# Altium PCB PCB2.PcbDoc
Units mm, origin at the board's own origin, x right, y up, seen from the top; angles counter-clockwise.
Board outline 150 x 120 mm, 4 copper layers (Top Layer, GND, VCC, Bottom Layer), stack 0.778 mm thick; 112 components, 75 nets, 379 pads, 111 vias.
Unrouted connection lines stored in the file: 76.
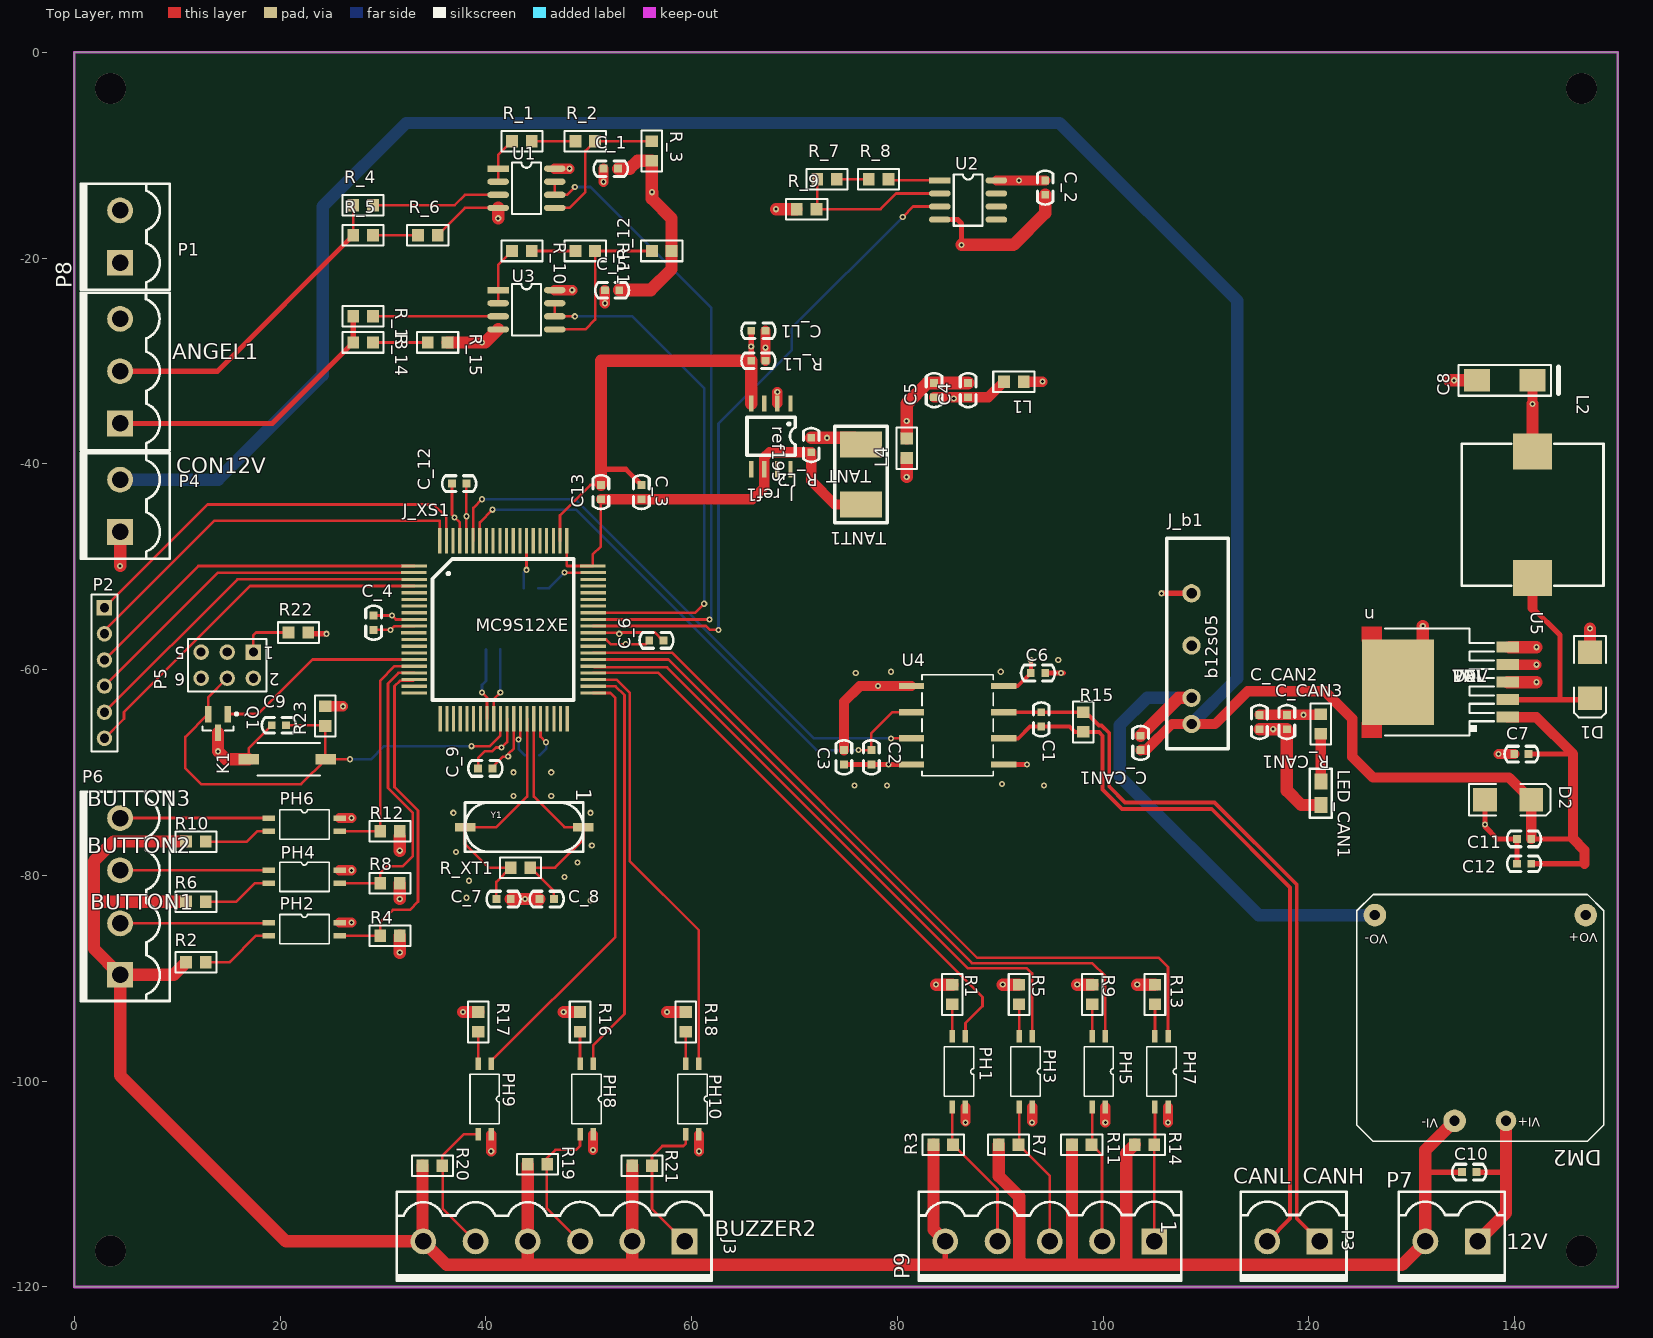
[diagram p0: Top Layer view]
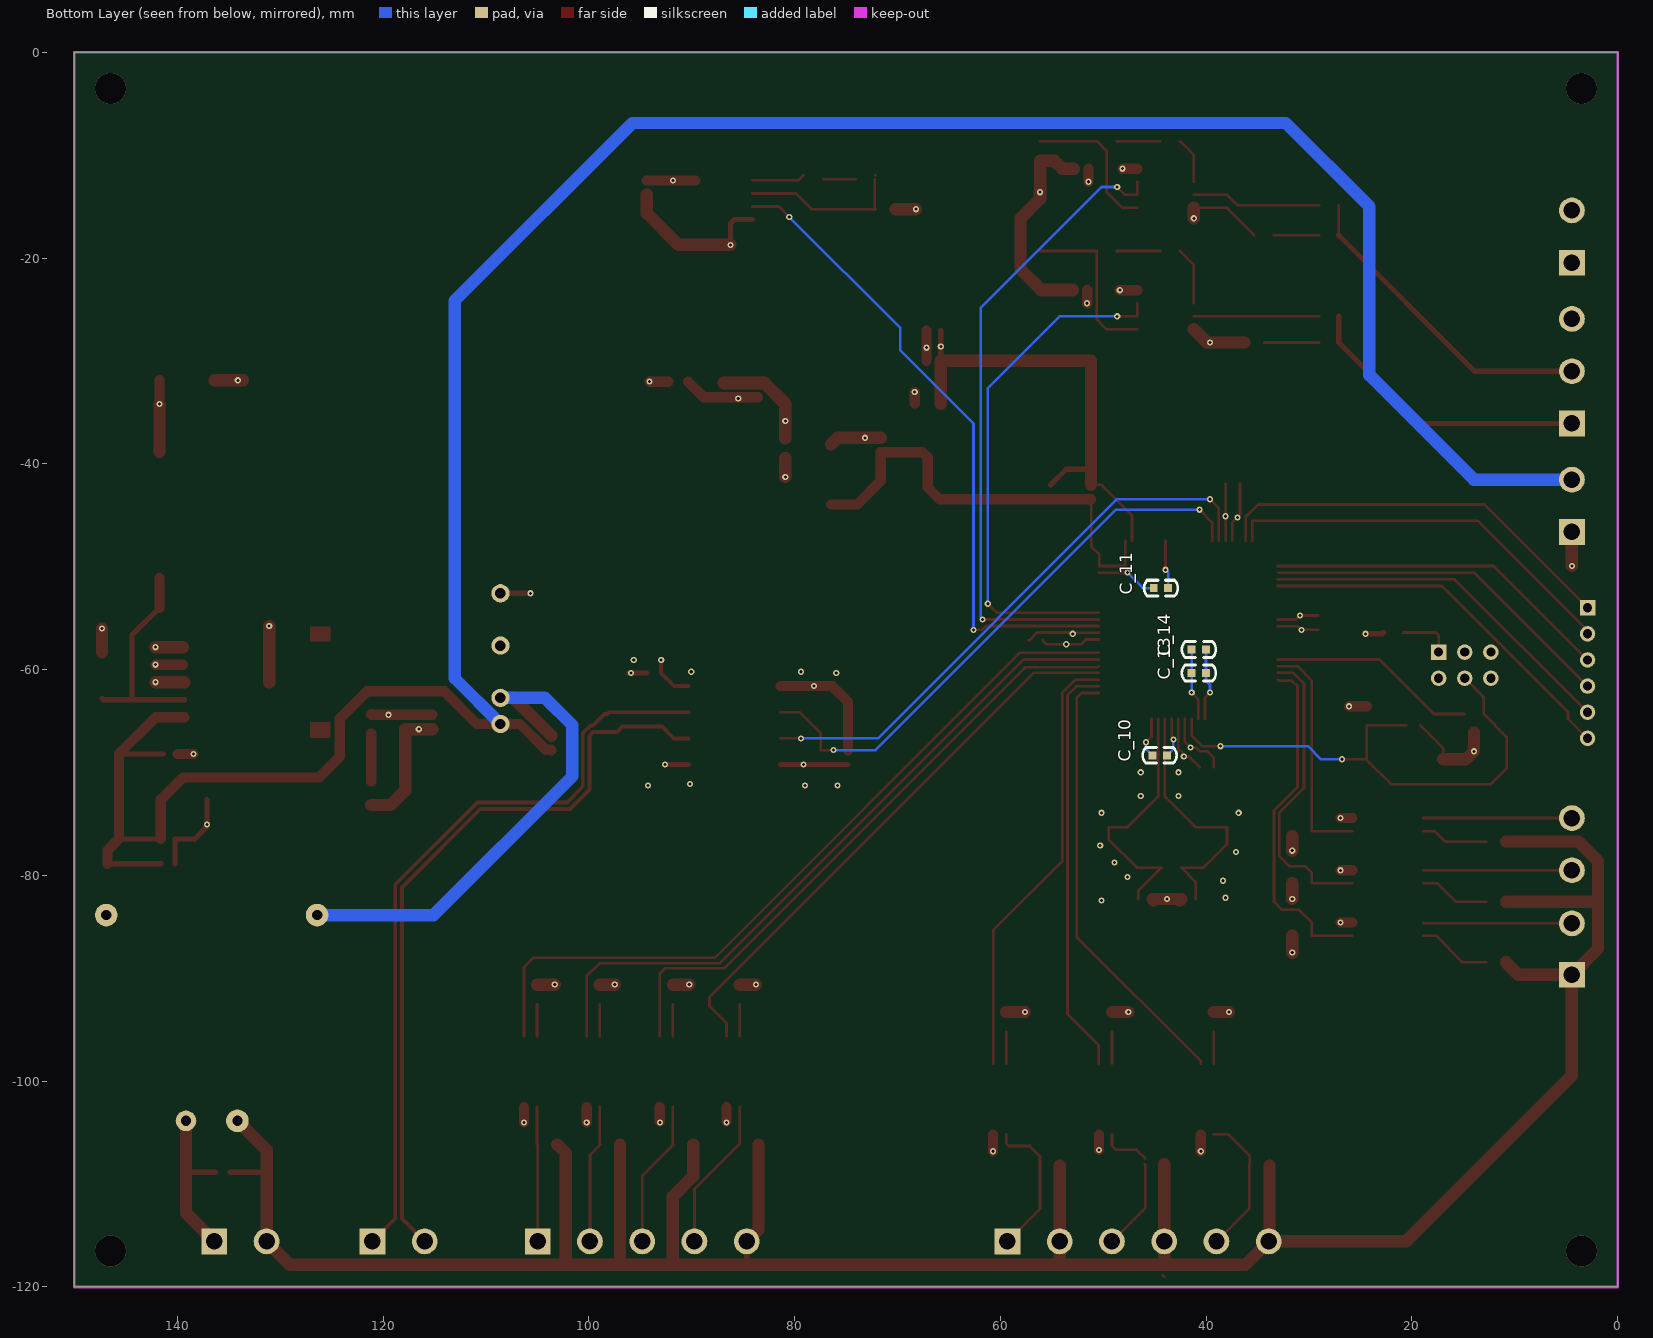
[diagram p1: Bottom Layer view, seen from below]
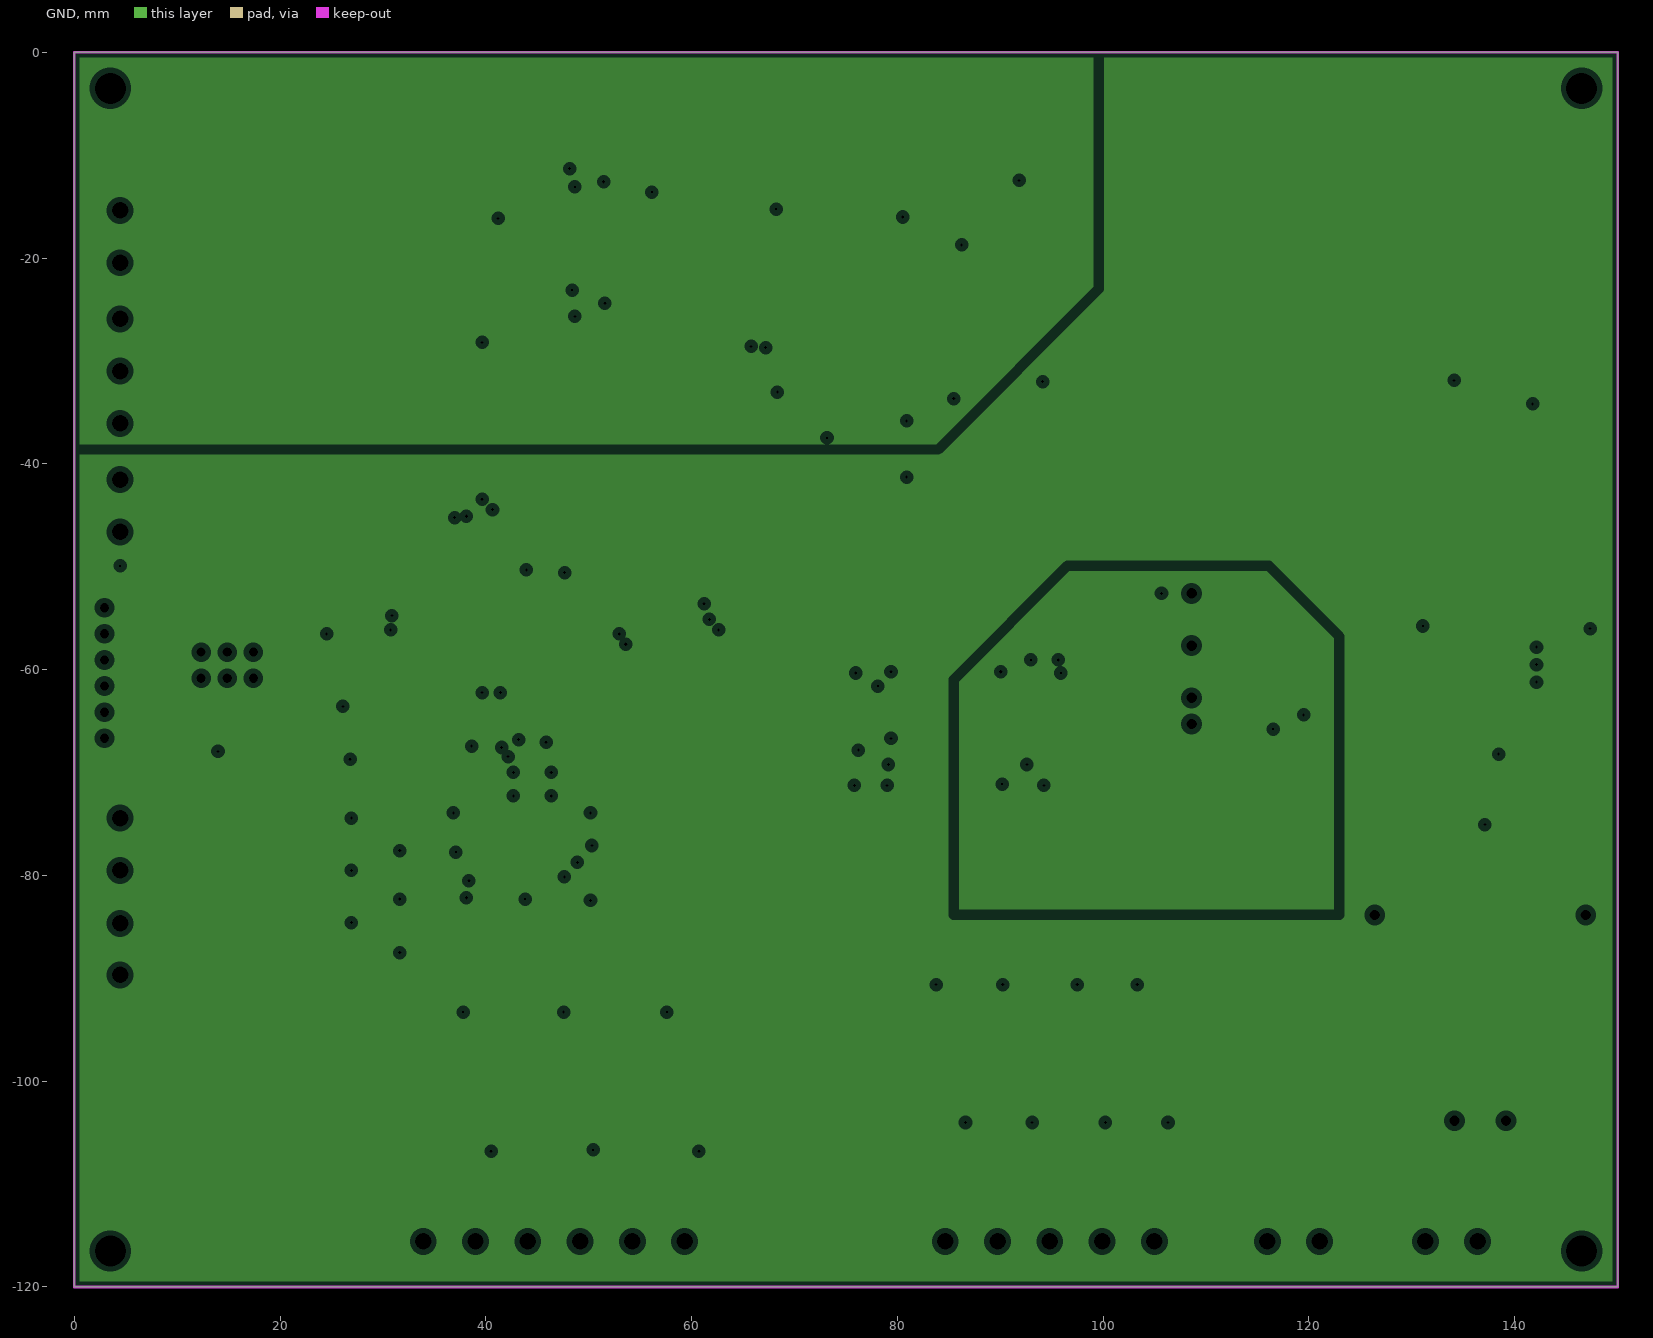
[diagram p2: GND, clearances drawn from the general rule]
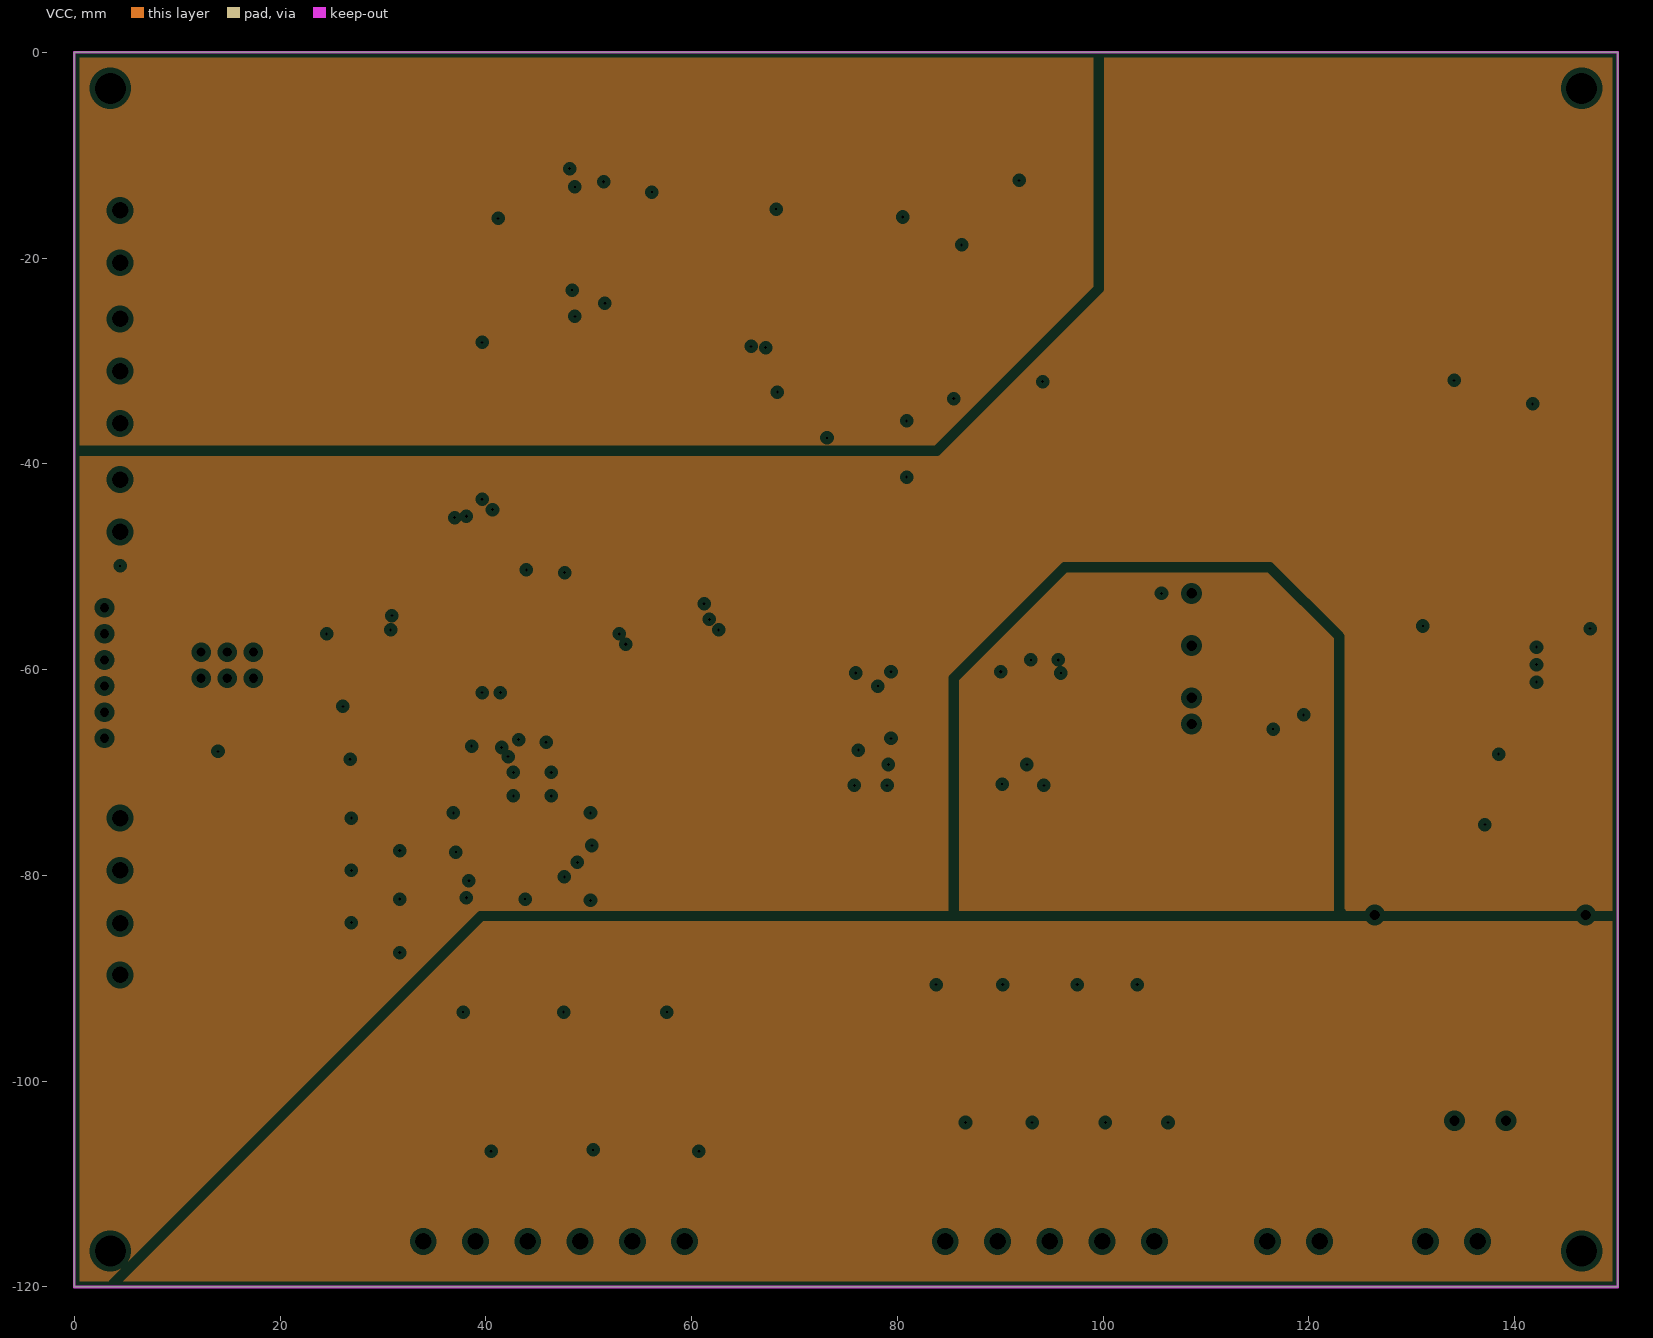
[diagram p3: VCC, clearances drawn from the general rule]

## Layer stack, top to bottom
Top Solder: solder mask 0.0102, Solder Resist, Dk 3.5
Top Layer: signal copper 0.0356
Dielectric 1: core 0.254, FR-4, Dk 4.2
GND: plane copper 0.036
Dielectric 3: prepreg 0.127, Dk 4.2
VCC: plane copper 0.036
Dielectric 2: core 0.254, Dk 4.2
Bottom Layer: signal copper 0.0356
Bottom Solder: solder mask 0.0102, Solder Resist, Dk 3.5

## Board outline
0,-120 150,-120 150,0 0,0

## Design rules (kind name [scope] priority, off if disabled: settings)
Clearance [All] p1: gap=0.254
DiffPairsRouting DiffPair_DiffPairsRouting [InDifferentialPair ('CAN')] p1: maxlimit=0.254 minlimit=0.254 mostfreqgap=0.254 toplayer_minwidth=0.381 toplayer_maxwidth=0.381 toplayer_prefwidth=0.381 bottomlayer_minwidth=0.381 bottomlayer_maxwidth=0.381 bottomlayer_prefwidth=0.381 maxuncoupledlength=12.7
DiffPairsRouting CAN_DiffPairsRouting [InDifferentialPair ('CAN')] p2: maxlimit=0.254 minlimit=0.254 mostfreqgap=0.254 toplayer_minwidth=0.381 toplayer_maxwidth=0.381 toplayer_prefwidth=0.381 bottomlayer_minwidth=0.381 bottomlayer_maxwidth=0.381 bottomlayer_prefwidth=0.381 maxuncoupledlength=12.7
DiffPairsRouting DiffPair_DiffPairsRouting [All] p3: maxlimit=0.254 minlimit=0.254 mostfreqgap=0.254 toplayer_minwidth=0.381 toplayer_maxwidth=0.381 toplayer_prefwidth=0.381 bottomlayer_minwidth=0.381 bottomlayer_maxwidth=0.381 bottomlayer_prefwidth=0.381 maxuncoupledlength=12.7
DiffPairsRouting [All] p4: maxlimit=0.254 minlimit=0.254 mostfreqgap=0.254 toplayer_minwidth=0.381 toplayer_maxwidth=0.381 toplayer_prefwidth=0.381 bottomlayer_minwidth=0.381 bottomlayer_maxwidth=0.381 bottomlayer_prefwidth=0.381 maxuncoupledlength=12.7
HoleSize [All] p1: absolutevalues=TRUE maxlimit=3 minlimit=0.025 maxpercent=80.000 minpercent=20.000
MatchedLengths DiffPair_MatchedLengths [InDifferentialPair ('CAN')] p1: tolerance=25.4 checknetsindiffpair=FALSE checkdiffpairvsdiffpair=TRUE checkxsignals=TRUE checkothers=TRUE
MatchedLengths CAN_MatchedLengths [InDifferentialPair ('CAN')] p2: tolerance=25.4 checknetsindiffpair=FALSE checkdiffpairvsdiffpair=TRUE checkxsignals=TRUE checkothers=TRUE
MatchedLengths DiffPair_MatchedLengths [All] p3: tolerance=25.4 checknetsindiffpair=FALSE checkdiffpairvsdiffpair=TRUE checkxsignals=TRUE checkothers=TRUE
MinimumSolderMaskSliver [All] p1: minsoldermaskwidth=0
PlaneClearance [All] p1: clearance=0.508
PlaneConnect [All] p1: planeconnectstyle=Relief reliefexpansion=0.508 reliefentries=4 reliefconductorwidth=0.254 reliefairgap=0.254
PolygonConnect [All] p1: connectstyle=Relief reliefconductorwidth=0.254 reliefentries=4 polygonreliefangle="90 Angle" airgapwidth=0.254
RoutingVias [All] p1: holewidth=0.711 width=1.27 viastyle="Through Hole" minholewidth=0.711 minwidth=1.27 maxholewidth=0.711 maxwidth=1.27
SilkToSilkClearance [All] p1: silktosilkclearance=0
SilkToSolderMaskClearance [IsPad] p1: minsilkscreentomaskgap=0 clearancetoexposedcopper=TRUE
SolderMaskExpansion [All] p1: expansion=0.102
Width [All] p1: maxlimit=1.5 minlimit=0.254 preferedwidth=0.254 minimp=50.000000 maximp=50.000000 favimp=50.000000
23 further rules are at their usual default settings.

## Classes and differential pairs
differential pair CAN: +CAN_P -CAN_N

## Components (designator, comment, footprint, x,y, rotation, side; value= is the part's Value field where it differs from the comment)
1 "XTAL" CRYSTAL_SMD_FIRE 49.473,-72.911 r0 top
C1 "Cap Pol3" 0603C 93.98,-64.262 r270 top
C2 "Cap Pol3" 0603C 77.47,-67.945 r270 top
C3 "Cap Pol3" 0603C 74.803,-67.945 r270 top
C4 "Cap Pol3" 0603C 86.868,-33.401 r90 top
C5 "Cap Pol3" 0603C 83.566,-33.401 r90 top
C6 "Cap Pol3" 0603C 94.234,-60.325 r180 top
C7 "Cap Pol3" 0603C 141.224,-68.199 r180 top
C8 "Cap Pol3" TITANIUMCAPC6032 139.032,-31.877 r180 top
C9 "Cap" 0603C 19.304,-65.405 r0 top
C10 "Cap Pol3" 0603C 136.144,-108.839 r180 top
C11 "Cap Pol3" 0603C 141.478,-76.454 r180 top
C12 "Cap Pol3" 0603C 141.478,-78.867 r180 top
C13 "Cap Pol3" 0603C 51.181,-43.307 r90 top
C_1 "104" 0603C 51.562,-11.303 r0 top
C_2 "104" 0603C 94.361,-12.573 r270 top
C_3 "104" 0603C 55.118,-43.307 r90 top
C_4 "104" 0603C 29.083,-54.864 r270 top
C_5 "104" 0603C 51.689,-23.114 r0 top
C_6 "104" 0603C 57.15,-57.15 r180 top
C_7 "104" 0603C 42.291,-82.296 r180 top
C_8 "104" 0603C 45.339,-82.296 r0 top
C_9 "104" 0603C 40.513,-69.596 r180 top
C_10 "104" 0603C 43.942,-68.326 r0 bottom
C_11 "104" 0603C 43.815,-52.07 r0 bottom
C_12 "104" 0603C 37.973,-41.91 r180 top
C_13 "104" 0603C 40.132,-60.325 r0 bottom
C_14 "104" 0603C 40.132,-58.039 r0 bottom
C_CAN1 "104" 0603C 103.632,-66.548 r270 top
C_CAN2 "104" 0603C 115.189,-65.659 r90 top
C_CAN3 "Cap Pol1" 0603C 117.856,-64.516 r270 top
C_L1 "Cap Pol1" 0603C 67.056,-27.051 r180 top
D1 "1N5824" SMB 147.32,-60.543 r270 top
D2 "SMBJ7.0A" SMB 139.355,-72.644 r0 top
DM2 "U?" dcdc 136.652,-93.853 r180 top
J3 "Light&Buzzer" KF2EDGK5.08-6P 59.309,-115.57 r180 top
J_b1 "b12s05" PCBComponent_1_8 108.077,-70.866 r90 top
J_ref1 "ref195" PCBComponent_1_13 69.571,-32.309 r270 top
J_XS1 "mc9s12" PCBComponent_1_15 32.791,-49.641 r0 top
K1 "SW-PB" KEY 20.701,-68.707 r180 top
L1 "Inductor" 0805 91.313,-32.004 r180 top
L2 "Inductor" L1260 141.732,-44.958 r90 top
L4 "Inductor" 0805 80.899,-38.481 r90 top
LED_CAN1 "LED2" PCBComponent_1_3 119.126,-70.231 r0 top
P1 "Header 3" KF2EDGK5.08-3P 4.445,-36.068 r90 top
P2 "Header 6" HDR1X6 2.921,-53.975 r270 top
P3 "Header 2" KF2EDGK5.08-2P 121.031,-115.57 r180 top
P4 "Header 2" KF2EDGK5.08-2P 4.445,-46.609 r90 top
P5 "Header 3X2" HDR2X3 17.399,-58.293 r180 top
P6 "Header 4" KF2EDGK5.08-4P 4.445,-89.662 r90 top
P7 "Header 2" KF2EDGK5.08-2P 136.398,-115.57 r180 top
P8 "Header 2" KF2EDGK5.08-2P 4.445,-20.447 r90 top
P9 "Header 5" KF2EDGK5.08-5P 104.968,-115.57 r180 top
PH1 "TLP291" SO4 85.979,-99.06 r270 top
PH2 "TLP291" SO4 22.352,-85.217 r0 top
PH3 "TLP291" SO4 92.456,-99.06 r270 top
PH4 "TLP291" SO4 22.352,-80.137 r0 top
PH5 "TLP291" SO4 99.568,-99.06 r270 top
PH6 "TLP291" SO4 22.352,-75.057 r0 top
PH7 "TLP291" SO4 105.664,-99.06 r270 top
PH8 "TLP291" SO4 49.784,-101.727 r270 top
PH9 "TLP291" SO4 39.878,-101.727 r270 top
PH10 "TLP291" SO4 60.071,-101.727 r270 top
Q1 "6A8" transistors 13.959,-65.212 r270 top
R1 "330" 0805 85.344,-91.567 r90 top
R2 "330" 0805 11.811,-88.453 r180 top
R3 "10k" 0805 84.455,-106.172 r0 top
R4 "1.9k" 0805 30.673,-85.852 r180 top
R5 "330" 0805 91.821,-91.567 r90 top
R6 "330" 0805 11.811,-82.55 r180 top
R7 "10k" 0805 90.805,-106.172 r0 top
R8 "1.9k" 0805 30.673,-80.772 r180 top
R9 "330" 0805 98.933,-91.567 r90 top
R10 "330" 0805 11.811,-76.708 r180 top
R11 "10k" 0805 97.917,-106.172 r0 top
R12 "1.9k" 0805 30.673,-75.692 r180 top
R13 "330" 0805 105.029,-91.567 r90 top
R14 "10k" 0805 104.013,-106.172 r0 top
R15 "Res3" 0805 98.044,-65.09 r90 top
R16 "Res2" 0805 49.149,-94.234 r270 top
R17 "Res2" 0805 39.243,-94.234 r270 top
R18 "Res2" 0805 59.436,-94.234 r270 top
R19 "Res2" 0805 45.019,-108.077 r0 top
R20 "Res2" 0805 34.798,-108.204 r0 top
R21 "Res2" 0805 55.184,-108.204 r0 top
R22 "Res3" 0805 21.778,-56.388 r180 top
R23 "Res3" 0805 24.384,-64.516 r90 top
R_1 "16k" 0805 43.495,-8.636 r0 top
R_2 "1k" 0805 49.657,-8.636 r0 top
R_3 "33k" 0805 56.134,-9.591 r90 top
R_4 "0" 0805 28.067,-14.859 r0 top
R_5 "120" 0805 28.067,-17.78 r0 top
R_6 "130" 0805 34.351,-17.78 r0 top
R_7 "16k" 0805 73.152,-12.319 r0 top
R_8 "1k" 0805 78.166,-12.319 r0 top
R_9 "33k" 0805 71.181,-15.24 r0 top
R_10 "16k" 0805 43.495,-19.304 r0 top
R_11 "1k" 0805 49.657,-19.304 r0 top
R_12 "33k" 0805 57.089,-19.304 r180 top
R_13 "0" 0805 28.067,-25.654 r0 top
R_14 "120" 0805 28.067,-28.194 r0 top
R_15 "130" 0805 35.311,-28.194 r0 top
R_CAN1 "Res3" 0805 121.158,-65.278 r270 top
R_L1 "104" 0603C 65.913,-29.972 r0 top
R_L2 "104" 0603C 71.628,-37.592 r270 top
R_XT1 "Res3" 0805 43.368,-79.248 r0 top
TANT1 "Cap Pol1" PCBComponent_1_19 84.836,-42.672 r180 top
U1 "OP279" SOP8_M 43.942,-13.208 r0 top
U2 "OP279" SOP8_M 86.868,-14.351 r0 top
U3 "OP279" SOP8_M 43.942,-25.019 r0 top
U4 "Part Number: ISO1050DUBR" DUB8 85.852,-65.405 r0 top
U5 "LM2596_TO263" LM2596_TO263 133.985,-61.214 r0 top

## Footprints (in the part's own frame and the unit in brackets; to place one, negate y for a bottom-side part, rotate by r counter-clockwise, add the part's x,y. Pads: shape width x height; smd on the part's side, far side on the other; paste and mask are expansions set on the pad)
0603C [mil]
  rect 30x30 smd: 1(-5,0) 2(50,0)
  silkscreen extent -42,-30 87,30
0805 [mm]
  rect 1.14x1.2 smd: 1(-0.955,0) 2(0.955,0)
  silkscreen extent -2,-1 2,1, body extent -1.15,-0.67 1.15,0.68, height 0.76
CRYSTAL_SMD_FIRE [mm]
  rect 2x0.85 smd: 1(-11.5,-2.4) 2(0,-2.4)
  silkscreen extent -11.5,-4.8 0,0
dcdc [mm]
  round 2 hole 1 unplated: 1(-2.5,10)
  round 2.2 hole 1 unplated: 2(2.5,9.996) 3(10.25,-10) 4(-10.25,-10)
  Top Layer lines w0.4: -9.594,-10.4 -10,-9.993
  Bottom Layer lines w0.4: -10,-9.993 -10,-9.993
  silkscreen extent -12,-12 12,12
DUB8 [mil]
  rect 96.5x24 smd paste+0 mask+0: 1(-176.25,150) 2(-176.25,50) 3(-176.25,-50) 4(-176.25,-150) 5(176.25,-150) 6(176.25,-50) 7(176.25,50) 8(176.25,150)
  silkscreen extent -136,-193 136,193
HDR1X6 [mm] "Connector; Header; 6 Position"
  rect 1.5x1.5 hole 0.9: 1(0,0)
  round 1.5 hole 0.9: 2(2.54,0) 3(5.08,0) 4(7.62,0) 5(10.16,0) 6(12.7,0)
  silkscreen extent -1.27,-1.27 13.97,1.27
HDR2X3 [mm] "Connector; Header; 3x2 Position"
  rect 1.5x1.5 hole 0.9: 1(0,0)
  round 1.5 hole 0.9: 2(0,2.54) 3(2.54,0) 4(2.54,2.54) 5(5.08,0) 6(5.08,2.54)
  silkscreen extent -1.27,-1.27 6.35,3.81
KEY [mm]
  rect 2x1 smd: 1(-3.75,0) 2(3.75,0)
  silkscreen extent -3.15,-1.6 2.9,1.6
KF2EDGK5.08-2P [mm] "直列插拔式端子"
  rect 2.5x2.5 hole 1.6: 1(0,0)
  round 2.5 hole 1.6: 2(5.08,0)
  silkscreen extent -2.62,-4.83 7.67,3.81, body extent -2.54,-4.75 7.62,3.75, height 11.25
KF2EDGK5.08-3P [mm] "直列插拔式端子"
  rect 2.5x2.5 hole 1.6: 1(0,0)
  round 2.5 hole 1.6: 2(5.08,0) 3(10.16,0)
  silkscreen extent -2.62,-4.83 12.7,3.81, body extent -2.54,-4.75 12.7,3.75, height 11.25
KF2EDGK5.08-4P [mm] "直列插拔式端子"
  rect 2.5x2.5 hole 1.6: 1(0,0)
  round 2.5 hole 1.6: 2(5,0) 3(10.16,0) 4(15.24,0)
  silkscreen extent -2.54,-4.83 17.78,3.81, body extent -2.54,-4.75 17.78,3.75, height 11.25
KF2EDGK5.08-5P [mm] "直列插拔式端子"
  rect 2.5x2.5 hole 1.6: 1(0,0)
  round 2.5 hole 1.6: 2(5.08,0) 3(10.16,0) 4(15.24,0) 5(20.32,0)
  silkscreen extent -2.62,-4.83 22.89,3.81, body extent -2.54,-4.75 22.86,3.75, height 11.25
KF2EDGK5.08-6P [mm] "直列插拔式端子"
  rect 2.5x2.5 hole 1.6: 1(0,0)
  round 2.5 hole 1.6: 2(5.08,0) 3(10.16,0) 4(15.24,0) 5(20.32,0) 6(25.4,0)
  silkscreen extent -2.62,-4.83 27.97,3.81, body extent -2.54,-4.75 27.94,3.75, height 11.25
L1260 [mm]
  rect 3.5x3.8 smd: 1(-6.15,0) 2(6.15,0)
  silkscreen extent -6.9,-6.9 6.9,6.9, body extent -6.98,-6.98 6.98,6.86, height 6
LM2596_TO263 [mm]
  rect 2.16x1.07 smd paste-0.102 mask+0.051: 1(5.338,-3.4) 2(5.338,-1.7) 3(5.338,0.005) 4(5.338,1.7) 5(5.338,3.4)
  rect 6.99x8.33 smd paste-0.102 mask+0.051: 6(-5.338,0)
  Top Layer region: -8.832,-3.9 -8.832,-5.4 -6.923,-5.4 -6.923,-3.9
  Top Layer region: -8.832,5.4 -8.832,4 -6.923,4 -6.923,5.4
  silkscreen extent -6.6,-5.2 4,5.2, body extent -8.85,-5.17 6.82,4.83, height 4.78
PCBComponent_1_3 [mil]
  rect 50x60 smd: 1(80,-25) 2(80,-115)
  silkscreen extent 38,-164 122,24
PCBComponent_1_8 [mil]
  round 70 hole 40: 1(220,-20) 2(320,-20) 3(520,-20) 4(720,-20)
  silkscreen extent 125,-160 930,75
PCBComponent_1_13 [mil]
  rect 62x16 smd: 1(72,1) 2(72,-49) 3(72,-99) 4(72,-149) 5(323,-149) 6(323,-99) 7(323,-49) 8(323,1)
  silkscreen extent 125,-165 270,20
PCBComponent_1_15 [mil]
  rect 97x12 smd: 1(9,-11) 2(8,-36.58) 3(9,-62.16) 4(9,-87.74) 5(9,-113.32) 6(9,-138.9) 7(9,-164.47) 8(9,-190.05) 9(9,-215.63) 10(9,-241.21) 11(8,-266.79) 12(9,-292.37) 13(9,-317.95) 14(9,-343.53) 15(9,-369.11) 16(9,-394.68) 17(9,-420.26) 18(9,-445.84) 19(9,-471.42) 20(9,-497) 41(694,-497) 42(694,-471.42) 43(694,-445.84) 44(694,-420.26) 45(694,-394.68) 46(694,-369.11) 47(694,-343.53) 48(694,-317.95) 49(694,-292.37) 50(694,-266.79) 51(694,-241.21) 52(694,-215.63) 53(694,-190.05) 54(694,-164.47) 55(694,-138.9) 56(694,-113.32) 57(694,-87.74) 58(694,-62.16) 59(694,-36.58) 60(692,-11)
  rect 12x97 smd: 21(109,-596) 22(134.58,-595) 23(160.16,-595) 24(185.74,-595) 25(211.32,-595) 26(236.89,-596) 27(262.47,-595) 28(288.05,-595) 29(313.63,-595) 30(339.21,-595) 31(364.79,-595) 32(390.37,-595) 33(415.95,-595) 34(441.53,-595) 35(467.1,-595) 36(492.68,-595) 37(518.26,-595) 38(543.84,-595) 39(569.42,-595) 40(595,-595) 61(593,86) 62(567.42,86) 63(541.84,86) 64(516.26,86) 65(490.68,86) 66(465.1,86) 67(439.53,86) 68(413.95,86) 69(388.37,86) 70(362.79,86) 71(337.21,86) 72(311.63,86) 73(286.05,86) 74(260.47,86) 75(234.89,86) 76(209.32,86) 77(183.74,86) 78(158.16,86) 79(132.58,86) 80(107,86)
  silkscreen extent 80,-524 620,15
PCBComponent_1_19 [mil]
  rect 160x100 smd: 1(330,50) 2(330,-180)
  silkscreen extent 230,-250 430,120
SMB [mm] "DO-214-AA/SMB; 2 C-Bend Leads; Body 5.3 x 3.6 mm, inc. leads (LxW)"
  rect 2.3x2.3 smd: 1(-2.25,0) 2(2.25,0)
  silkscreen extent -3.8,-1.55 4.1,1.55
SO4 [mil]
  rect 48x21 smd paste+0 mask+0: 1(-135.67,25) 2(-135.67,-25) 3(135.67,-25) 4(135.67,25)
  silkscreen extent -95,-56 95,56
SOP8_M [mm] "5*6*1.8mm（长宽高）"
  rect 2.1x0.6 smd: 1(-2.75,1.905)
  oval 2.1x0.6 smd: 2(-2.75,0.635) 3(-2.75,-0.635) 4(-2.75,-1.905) 5(2.75,-1.905) 6(2.75,-0.635) 7(2.75,0.635) 8(2.75,1.905)
  silkscreen extent -1.4,-2.5 1.4,2.5
TITANIUMCAPC6032 [mm]
  rect 2.5x2.2 smd: 1(-2.7,0) 2(2.7,0)
  silkscreen extent -5.21,-1.5 4.5,1.5, body extent -3.15,-1.75 3.15,1.75, height 2.8
transistors [mm] "SOT23, 3-Leads, Body 2.92x2.37mm, Pitch 0.95mm, IPC Medium Density"
  rect 1.6x0.6 smd: 1(-0.9,0.95) 2(-0.9,-0.95) 3(0.9,0)
  silkscreen extent -1.02,-1.5 0.7,1.93, body extent -0.7,-1.52 0.7,1.52, height 1.11

## Part data
1: "Crystal Oscillator"
C1 C2 C3 C4 C5 C6 C7 C8 C10 C11 C12 C13: "Polarized Capacitor (Surface Mount)"
C9: "Ceramic, X7R, 100V, 10%, 0603"
C_1 C_2 C_3 C_4 C_5 C_6 C_7 C_8 C_9 C_10 C_11 C_12 C_13 C_14 C_CAN1 C_CAN2 R_L1 R_L2: library part Cap, "Capacitor"
C_CAN3 C_L1 TANT1: "Polarized Capacitor (Radial)"
D1 D2: library part "D Zener", "Zener Diode"
DM2: library part Component_1
J3: library part HAD1*6
K1: "Switch"
LED_CAN1: "Typical RED, GREEN, YELLOW, AMBER GaAs LED"
P1: "Header, 3-Pin"
P2: "Header, 6-Pin"
P3 P4 P7 P8: "Header, 2-Pin"
P5: "Header, 3-Pin, Dual row"
P6: "Header, 4-Pin"
P9: "Header, 5-Pin"
PH1 PH2 PH3 PH4 PH5 PH6 PH7 PH8 PH9 PH10: "Optoisolator"
R1 R2 R3 R4 R5 R6 R7 R8 R9 R10 R11 R12 R13 R14 R_1 R_2 R_3 R_4 R_5 R_6 R_7 R_8 R_9 R_10 R_11 R_12 R_13 R_14 R_15: library part RES, "Resistor"
R15 R16 R17 R18 R19 R20 R21 R22 R23 R_CAN1 R_XT1: "Resistor"
U4: library part ISO1050DUBR, "No Description Available"

## Via types
v1: diameter 0.6, hole 0.3, Top Layer to Bottom Layer, 107 vias
v2: diameter 3, hole 3, Top Layer to Bottom Layer, 4 vias

## Nets (pads, with @x,y where several pads share a name; then routed paths per layer and width w, separated by ;. In a path a pad name is that pad's centre, name@x,y a point inside that pad or via, vN(x,y) a via of type N, cw(c..) or ccw(c..) an arc to the next point about the centre after c; other vN are vias at no path point)
+5V_ADC: C13.1 C_3.1 J_ref1.6 J_XS1.60 J_XS1.61 R_L2.2 TANT1.1 | length 44.4
  Top Layer w0.254: J_XS1.61 47.854,-49.886 47.888,-49.92 J_XS1.60 50.368,-48.819 51.181,-48.006 C13.1
  Top Layer w1: C13.1 C_3.1 65.913,-43.434 67.056,-42.291 J_ref1.6 67.056,-39.37 67.564,-38.862 R_L2.2 71.628,-41.656 73.914,-43.942 TANT1.1
+5V_CAN: C6.2 C_CAN2.2 C_CAN3.1 J_b1.4 R_CAN1.1 U4.8 | length 13.3
  Top Layer w0.381: U4.8 91.694,-61.595 C6.2 v1(92.964,-59.055)
  Top Layer w0.508: v1(105.664,-52.578) J_b1.4
  Top Layer w1: C_CAN2.2 C_CAN3.1 v1(119.474,-64.389) 121.092,-64.389 R_CAN1.1
+5V_MCU: C3.1 C8.1 C_4.1 C_6.2 C_9.2 C_10.2 C_11.2 C_12.2 C_13.2 C_14.2 J_XS1.9 J_XS1.29 J_XS1.31 J_XS1.36 J_XS1.49 J_XS1.59 J_XS1.77 L1.1 L2.2 P5.6 PH2.4 PH4.4 PH6.4 R22.1 R23.2 U4.1 U5.4 | length 69.9
  Top Layer w0.254: C_4.1 v1(30.861,-54.737) 31.242,-55.118 J_XS1.9 ; C_12.2 36.703,-44.958 v1(36.957,-45.212) 37.458,-45.713 J_XS1.77 ; C_9.2@39.243,-69.469 39.243,-68.58 39.878,-67.945 40.596,-67.945 40.977,-67.564 v1(41.529,-67.564) 42.057,-67.036 J_XS1.31 ; J_XS1.29 40.758,-62.874 v1(41.402,-62.23) ; J_XS1.36 45.306,-66.515 v1(45.847,-67.056) v1@45.974,-67.183 ; v1(47.649,-50.57) J_XS1.59 J_XS1.59@50.395,-50.546 ; J_XS1.49 51.692,-57.067 52.156,-57.531 v1(53.594,-57.531) 55.499,-57.531 C_6.2
  Top Layer w0.508: R22.1 22.86,-56.515 v1(24.511,-56.515)
  Top Layer w1: R23.2 v1(26.101,-63.561) ; PH2.4 v1(26.924,-84.582) ; PH4.4 v1(26.924,-79.502) ; PH6.4 v1(26.924,-74.422) ; C3.1 74.803,-63.119 76.327,-61.595 v1(78.105,-61.595) U4.1 ; L1.1 v1(94.107,-32.004) ; U5.4@139.453,-59.514 v1(142.113,-59.514) ; v1(141.732,-34.163) C8.1
  Top Layer w1.2: L2.2 v1(141.732,-34.163)
  Bottom Layer w0.254: v1(41.402,-62.23) C_13.2 C_14.2 ; C_11.2 46.149,-52.07 v1(47.649,-50.57) ; C_10.2 45.847,-67.691 v1(45.847,-67.056)
+12V: C10.1 DM2.1 P7.1 PH1.4 PH3.4 PH5.4 PH7.4 PH8.4 PH9.4 PH10.4 | length 26.3
  Top Layer w0.508: C10.1 139.152,-108.839
  Top Layer w1: v1(40.513,-106.807) PH9.4 ; v1(50.419,-106.68) PH8.4 ; v1(60.706,-106.807) PH10.4 ; v1@86.614,-103.886 PH1.4 ; v1@93.091,-103.886 PH3.4 ; v1(100.203,-104.013) PH5.4 ; v1(106.299,-104.013) PH7.4
  Top Layer w1.2: P7.1 139.152,-112.816 139.152,-108.839 DM2.1
  other v1: 86.614,-104.013 93.091,-104.013
A5V: C4.1 C5.1 C_1.1 C_2.1 C_5.1 C_L1.1 J_ref1.2 L1.2 R_L1.2 U1.8 U2.8 U3.8 | length 21.9
  Top Layer w1: U3.8 v1(48.387,-23.114) ; U1.8 v1(48.133,-11.303) ; v1(51.435,-12.573) C_1.1 ; v1(51.562,-24.384) C_5.1 ; R_L1.2 v1(67.183,-28.702) C_L1.1 ; J_ref1.2 v1(68.326,-33.02) ; C5.1 C4.1 88.834,-33.528 L1.2 ; U2.8 v1(91.821,-12.446) C_2.1
  other v1: 85.471,-33.655
AD_1: J_XS1.51 U2.3 | length 63.9
  Top Layer w0.254: J_XS1.51 50.434,-55.753 61.394,-55.753 61.775,-56.134 v1(62.611,-56.134) ; v1(80.518,-16.002) 81.534,-14.986 U2.3
  Bottom Layer w0.254: v1(62.611,-56.134) 62.611,-36.068 69.723,-28.956 69.723,-26.797 v1(80.518,-16.002)
AD_2: J_XS1.52 U1.6 U1.7 | length 63.3
  Top Layer w0.254: U1.7 U1.6 47.879,-13.843 v1(48.641,-13.081) ; J_XS1.52 v1(61.722,-55.118)
  Bottom Layer w0.254: v1(48.641,-13.081) 50.165,-13.081 61.895,-24.811 61.895,-54.945 v1(61.722,-55.118)
AD_3: J_XS1.53 U3.6 U3.7 | length 50.8
  Top Layer w0.254: U3.7 U3.6 v1(48.641,-25.654) ; J_XS1.53 60.34,-54.468 v1(61.214,-53.594)
  Bottom Layer w0.254: v1(48.641,-25.654) 54.229,-25.654 61.214,-32.639 v1(61.214,-53.594)
AGND: C4.2 C5.2 C13.2 C_1.2 C_2.2 C_3.2 C_5.2 C_L1.2 J_ref1.4 J_XS1.62 L4.2 P1.3 P8.2 R_3.1 R_6.2 R_9.1 R_12.1 R_15.2 R_L1.1 R_L2.1 TANT1.2 U1.4 U2.4 U3.4 | length 113.1
  Top Layer w0.254: R_6.2 37.973,-15.113 U1.4 ; J_XS1.62 47.204,-44.998 50.165,-42.037 C13.2
  Top Layer w0.508: 51.181,-40.513 53.594,-40.513 C_3.2 ; R_L1.1 v1(65.786,-28.575) C_L1.2 ; U2.4 85.852,-16.256 86.233,-16.637 v1(86.233,-18.713)
  Top Layer w1.2: R_15.2 v1(39.624,-28.194) 39.922,-28.194 U3.4 ; v1(41.192,-16.129) U1.4 ; C13.2 51.181,-40.513 51.181,-29.972 R_L1.1 J_ref1.4 ; C_1.2 53.975,-11.303 54.732,-10.546 R_3.1 v1(56.134,-13.589) ; 56.007,-23.114 58.044,-21.077 R_12.1 58.044,-16.134 56.134,-14.224 ; v1(68.199,-15.24) R_9.1@70.165,-15.24 ; R_L2.1 v1(73.152,-37.465) 75.819,-37.465 TANT1.2 ; L4.2 v1(80.899,-35.814) ; v1(86.233,-18.713) 91.269,-18.713 94.361,-15.621 C_2.2
  Top Layer w1.25: C_5.2 56.007,-23.114 ; 56.134,-14.224 v1(56.134,-13.589) ; v1(80.899,-35.814) 80.899,-34.163 82.931,-32.131 C5.2 C4.2
ANGLE1: P1.2 R_4.1 R_5.1 | length 31.1
  Top Layer w0.254: R_5.1 R_4.1
  Top Layer w0.508: P1.2 13.904,-30.988 R_5.1
ANGLE2: P1.1 R_13.1 R_14.1 | length 28.5
  Top Layer w0.508: P1.1 19.238,-36.068 R_14.1 R_13.1
BGKD: P5.1 R22.2 | length 5.2
  Top Layer w0.254: P5.1 17.399,-56.642 17.653,-56.388 R22.2
BKGD: J_XS1.15 Q1.1 | length 20.3
  Top Layer w0.254: Q1.1 17.857,-64.312 23.153,-59.016 J_XS1.15
BUTTON1: P6.2 PH2.1 | length 14.5
  Top Layer w0.254: P6.2 18.826,-84.662 PH2.1
BUTTON2: P6.3 PH4.1 | length 14.5
  Top Layer w0.254: P6.3 PH4.1
BUTTON3: P6.4 PH6.1 | length 14.5
  Top Layer w0.254: P6.4 PH6.1
BUZZER1: J3.5 PH9.3 R20.2 | length 14
  Top Layer w0.254: J3.5 35.819,-112.4 35.819,-108.204 R20.2 35.753,-107.249 37.829,-105.173 PH9.3
BUZZER2: J3.1 PH10.3 R21.2 | length 14.3
  Top Layer w0.254: J3.1 56.139,-112.4 R21.2 56.139,-107.31 57.15,-106.299 59.182,-106.299 59.436,-106.045 PH10.3
CAN_N: C1.1 P3.1 R15.2 U4.7 | length 74.1
  Top Layer w0.381: U4.7 C1.1 R15.2 98.234,-64.325 98.489,-64.325 99.573,-65.41 99.836,-65.41 100.584,-66.158 100.584,-71.374 102.108,-72.898 110.817,-72.898 118.808,-80.89 118.808,-113.347 P3.1
CAN_P: C1.2 P3.2 R15.1 U4.6 | length 73.2
  Top Layer w0.381: U4.6 91.745,-66.675 92.888,-65.532 C1.2 96.74,-65.532 97.254,-66.045 R15.1 99.573,-66.045 99.949,-66.421 99.949,-71.637 101.845,-73.533 110.553,-73.533 118.173,-81.153 118.173,-113.347 P3.2
CAN_RX: C2.1 J_XS1.74 U4.2 | length 56.2
  Top Layer w0.254: J_XS1.74 39.407,-45.683 v1(40.64,-44.45) ; v1@76.454,-67.818 C2.1 77.47,-66.167 79.502,-64.135 U4.2
  Bottom Layer w0.254: v1(40.64,-44.45) 48.768,-44.45 72.136,-67.818 v1(76.2,-67.818)
CAN_TX: J_XS1.75 U4.3 | length 55.5
  Top Layer w0.254: J_XS1.75 38.781,-47.433 38.781,-44.277 v1(39.624,-43.434) ; v1@79.629,-66.675 U4.3
  Bottom Layer w0.254: v1(39.624,-43.434) 48.641,-43.434 71.882,-66.675 v1(79.375,-66.675)
CON12V: C7.1 C11.1 C12.1 C_CAN1.2 D2.2 DM2.4 J_b1.1 P4.2 U5.1 | length 265.6
  Top Layer w0.508: C7.1 145.669,-68.199 ; C12.1 146.775,-78.867 ; C11.1 145.669,-76.454
  Top Layer w1: C_CAN1.2 103.675,-67.775 104.193,-67.775 106.69,-65.278 J_b1.1 110.871,-65.278 114.046,-62.103 121.55,-62.103 124.206,-64.759 124.206,-68.453 126.238,-70.485 139.446,-70.485 D2.2 C11.1 ; U5.1 142.084,-64.614 145.669,-68.199 145.669,-76.2 ; 145.669,-76.454 146.775,-77.56 146.775,-78.867
  Bottom Layer w1.2: P4.2 13.97,-41.529 24.13,-31.369 24.13,-14.986 32.258,-6.858 95.758,-6.858 113.03,-24.13 113.03,-60.833 J_b1.1
EXTAL: 1.1 C_7.2 J_XS1.34 R_XT1.1 | length 25.5
  Top Layer w0.254: C_7.2 41.021,-80.64 R_XT1.1 40.259,-79.248 37.973,-76.962 1.1 41.021,-75.311 44.006,-72.326 J_XS1.34
FORWARD: P8.1 R_8.2 U2.1 | length 5.2
  Top Layer w0.254: R_8.2@79.121,-11.938 79.629,-12.446 U2.1
GND: C10.2 DM2.2 J3.2 J3.4 J3.6 P6.1 P7.2 P9.5 R2.2 R3.1 R6.2 R7.1 R10.2 R11.1 R14.1 R19.1 R20.1 R21.1 | length 274.9
  Top Layer w0.508: 84.582,-117.856 84.648,-117.79 P9.5 ; 131.318,-108.839 C10.2
  Top Layer w1.2: R2.2 9.647,-89.662 P6.1 ; R6.2 1.905,-82.55 ; R10.2 3.81,-76.708 1.905,-78.613 1.905,-82.55 ; R20.1 33.843,-115.504 J3.6 ; R19.1 44.064,-115.565 J3.4 44.069,-117.856 ; R21.1 J3.2 54.229,-117.729 54.102,-117.856 ; R3.1 83.5,-114.422 P9.5 ; R7.1 89.85,-109.225 91.832,-111.207 91.832,-117.359 92.329,-117.856 ; R11.1 96.962,-117.795 96.901,-117.856 ; R14.1 102.235,-106.995 102.235,-117.856 ; DM2.2 131.318,-106.683 131.318,-108.839 P7.2 129.032,-117.856 102.235,-117.856 ; 1.905,-82.55 1.905,-87.122 P6.1 ; P6.1 4.445,-99.441 20.574,-115.57 J3.6 ; J3.6 36.195,-117.856 44.069,-117.856 ; 44.069,-117.856 54.102,-117.856 ; 54.102,-117.856 84.582,-117.856 92.329,-117.856 ; 92.329,-117.856 96.901,-117.856 ; 96.901,-117.856 102.235,-117.856
GND1: C2.2 C3.2 C7.2 C8.2 C9.1 C11.2 C12.2 C_4.2 C_6.1 C_7.1 C_8.1 C_9.1 C_10.1 C_11.1 C_12.1 C_13.1 C_14.1 C_CAN1.1 D1.1 D2.1 DM2.3 J_b1.2 J_XS1.10 J_XS1.28 J_XS1.32 J_XS1.33 J_XS1.50 J_XS1.67 J_XS1.76 K1.2 L4.1 P4.1 P5.2 Q1.3 R1.2 R4.1 R5.2 R8.1 R9.2 R12.1 R13.2 R16.1 R17.1 R18.1 U4.4 U5.3 U5.5 U5.6 | length 154.7
  Top Layer w0.254: K1.2 16.951,-67.631 C9.1 ; C_4.2 v1(30.734,-56.134) 31.1,-55.768 J_XS1.10 ; v1(38.1,-45.085) C_12.1 ; J_XS1.76 v1@38.108,-44.839 ; v1(39.624,-62.23) 40.108,-62.714 J_XS1.28 ; C_9.1@40.64,-69.469 41.656,-68.453 v1(42.164,-68.453) 42.164,-68.199 42.707,-67.656 J_XS1.32 ; v1(43.18,-66.802) 43.356,-66.626 J_XS1.33 ; v1(43.942,-50.292) 43.942,-47.47 J_XS1.67 ; J_XS1.50@50.45,-56.386 J_XS1.50 52.861,-56.417 v1(52.959,-56.515) 53.086,-56.388 56.419,-56.388 57.181,-57.15 C_6.1
  Top Layer w0.508: C3.2 C2.2 v1(79.121,-69.215) U4.4 ; D2.1 v1(137.105,-75.057) 137.105,-75.256 138.303,-76.454 C11.2 C12.2
  Top Layer w1: v1(138.43,-68.199) C7.2
  Top Layer w1.2: v1(4.445,-49.911) P4.1 ; Q1.3 v1(13.959,-67.934) 14.732,-68.707 K1.2 ; v1(31.628,-87.498) R4.1 ; v1(31.628,-82.296) R8.1 ; v1(31.628,-77.592) R12.1@31.628,-76.2 ; v1(37.78,-93.279) R17.1 ; C_7.1 42.545,-82.423 42.672,-82.296 v1(43.815,-82.296) 44.958,-82.296 45.085,-82.423 C_8.1 ; v1(47.559,-93.279) R16.1 ; v1(57.597,-93.279) R18.1 ; v1(80.899,-41.275) L4.1 ; v1(83.759,-90.612) R1.2 ; v1(90.236,-90.612) R5.2 ; v1(97.475,-90.612) R9.2 ; v1(103.312,-90.612) R13.2 ; C_CAN1.1 107.315,-62.738 J_b1.2 ; U5.6@131.064,-61.214 v1(131.064,-55.753) ; 133.604,-31.877 v1(134.112,-31.877) C8.2 C8.2@136.365,-31.877 ; U5.3 142.108,-61.209 v1(142.113,-61.214) ; U5.5@139.453,-57.814 v1(142.113,-57.814) ; D1.1 v1(147.32,-56.007)
  Bottom Layer w0.254: v1(39.624,-62.23) 39.624,-61.468 40.005,-61.087 C_13.1 C_14.1 ; v1(43.18,-66.802) 43.18,-67.691 C_10.1 ; C_11.1 43.688,-50.546 v1(43.942,-50.292)
  Bottom Layer w1.2: J_b1.2 104.267,-62.738 101.6,-65.405 101.6,-70.358 115.095,-83.853 DM2.3
GND_CAN: C6.1 C_CAN2.1 C_CAN3.2 J_b1.3 LED_CAN1.2 U4.5 | length 16.5
  Top Layer w0.508: U4.5 v1(92.583,-69.215) ; C6.1 v1(95.885,-60.325) v1@96.139,-60.325
  Top Layer w1.2: C_CAN2.1 v1(116.522,-65.786) C_CAN3.2 117.856,-71.755 119.253,-73.152 LED_CAN1.2
LIGHT: J3.3 PH8.3 R19.2 | length 13.7
  Top Layer w0.254: R19.2@45.913,-107.52 46.753,-106.68 48.768,-106.68 49.149,-106.299 PH8.3 ; R19.2 45.913,-108.138 45.913,-112.334 J3.3
NetD1_2: D1.2 L2.1 U5.2 | length 21
  Top Layer w0.508: U5.2 144.399,-62.914 ; 141.732,-53.975 144.399,-56.642 144.399,-62.914 ; D1.2 147.199,-62.914 144.399,-62.914
  Top Layer w1: 141.732,-53.975 L2.1
NetLED_CAN1_1: LED_CAN1.1 R_CAN1.2 | length 4.6
  Top Layer w1: LED_CAN1.1 R_CAN1.2
NetPH1_2: PH1.2 R1.1 | length 3.1
  Top Layer w0.254: PH1.2 R1.1
NetPH2_2: PH2.2 R2.1 | length 7.3
  Top Layer w0.254: R2.1 15.113,-88.453 15.113,-88.392 17.653,-85.852 PH2.2
NetPH3_2: PH3.2 R5.1 | length 3.1
  Top Layer w0.254: PH3.2 R5.1
NetPH4_2: PH4.2 R6.1 | length 6.9
  Top Layer w0.254: R6.1 15.748,-82.55 17.526,-80.772 PH4.2
NetPH5_2: PH5.2 R9.1 | length 3.1
  Top Layer w0.254: PH5.2 R9.1
NetPH6_2: PH6.2 R10.1 | length 6.6
  Top Layer w0.254: R10.1 16.764,-76.708 17.78,-75.692 PH6.2
NetPH7_2: PH7.2 R13.1 | length 3.1
  Top Layer w0.254: PH7.2 R13.1
NetPH8_2: PH8.2 R16.2 | length 3.1
  Top Layer w0.254: PH8.2 R16.2
NetPH9_2: PH9.2 R17.2 | length 3.1
  Top Layer w0.254: PH9.2 R17.2
NetPH10_2: PH10.2 R18.2 | length 3.1
  Top Layer w0.254: PH10.2 R18.2
NetR_1_1: R_1.1 U1.1 U1.2 | length 4.5
  Top Layer w0.254: U1.2 U1.1 41.192,-9.984 R_1.1
NetR_1_2: R_1.2 R_2.1 | length 4.3
  Top Layer w0.254: R_1.2 R_2.1
NetR_2_2: R_2.2 R_3.2 U1.5 | length 14.5
  Top Layer w0.254: U1.5 48.133,-15.113 49.657,-13.589 49.657,-9.591 R_2.2 R_3.2
NetR_4_2: R_4.2 U1.3 | length 12.6
  Top Layer w0.254: R_4.2 36.957,-14.859 37.973,-13.843 U1.3
NetR_5_2: R_5.2 R_6.1 | length 4.4
  Top Layer w0.254: R_5.2 R_6.1
NetR_7_1: R_7.1 R_9.2 U2.2 | length 15.6
  Top Layer w0.254: R_7.1@72.131,-11.938 R_7.1@72.136,-11.943 ; R_7.1 72.197,-15.179 R_9.2 78.359,-15.24 79.883,-13.716 U2.2
NetR_7_2: R_7.2 R_8.1 | length 3.2
  Top Layer w0.254: R_7.2@74.041,-12.319 R_7.2 R_8.1
NetR_10_1: R_10.1 U3.1 U3.2 | length 5.6
  Top Layer w0.254: U3.2 U3.1 41.192,-20.652 R_10.1
NetR_10_2: R_10.2 R_11.1 | length 4.3
  Top Layer w0.254: R_10.2 R_11.1
NetR_11_2: R_11.2 R_12.2 U3.5 | length 16.5
  Top Layer w0.254: U3.5 49.657,-26.924 50.612,-25.969 R_11.2 R_12.2
NetR_13_2: R_13.2 U3.3 | length 12.2
  Top Layer w0.254: R_13.2 U3.3
NetR_14_2: R_14.2 R_15.1 | length 5.3
  Top Layer w0.254: R_14.2 R_15.1
P0: J_XS1.4 P2.6 | length 36.6
  Top Layer w0.254: P2.6 4.826,-64.77 4.826,-64.135 17.092,-51.869 J_XS1.4
P1: J_XS1.3 P2.5 | length 35.4
  Top Layer w0.254: P2.5 15.836,-51.22 J_XS1.3
P2: J_XS1.2 P2.4 | length 34.6
  Top Layer w0.254: P2.4 13.946,-50.57 J_XS1.2
P3: J_XS1.1 P2.3 | length 33.9
  Top Layer w0.254: P2.3 12.056,-49.92 J_XS1.1
P4: J_XS1.80 P2.2 | length 39.2
  Top Layer w0.254: P2.2 2.921,-56.21 13.589,-45.542 35.509,-45.542 J_XS1.80
P5: J_XS1.79 P2.1 | length 40.2
  Top Layer w0.254: P2.1 12.954,-43.942 34.925,-43.942 36.159,-45.176 J_XS1.79
RESET: C9.2 J_XS1.30 K1.1 P5.4 Q1.2 R23.1 | length 52.4
  Top Layer w0.254: P5.4 13.009,-62.683 Q1.2 10.795,-66.526 10.795,-69.596 12.319,-71.12 22.038,-71.12 K1.1 ; C9.2 24.318,-65.405 R23.1 24.384,-68.64 K1.1 ; v1(26.797,-68.707) K1.1 ; v1(38.608,-67.437) 40.386,-67.437 41.407,-66.416 J_XS1.30
  Bottom Layer w0.254: v1(26.797,-68.707) 28.829,-68.707 30.099,-67.437 v1(38.608,-67.437)
S1IN: J_XS1.18 PH2.3 R4.2 | length 33.8
  Top Layer w0.254: PH2.3 R4.2 29.718,-84.582 30.953,-83.347 32.604,-83.347 33.401,-82.55 33.401,-73.704 31.115,-71.418 31.115,-61.597 31.63,-61.082 32.904,-61.082 J_XS1.18
S2IN: J_XS1.17 PH4.3 R8.2 | length 29.5
  Top Layer w0.254: PH4.3 R8.2 29.718,-79.756 30.353,-79.121 31.877,-79.121 32.893,-78.105 32.893,-73.914 30.48,-71.501 30.48,-61.341 31.505,-60.316 J_XS1.17
S3IN: J_XS1.16 PH6.3 R12.2 | length 22.4
  Top Layer w0.254: PH6.3 R12.2 29.718,-61.087 31.139,-59.666 J_XS1.16
SIGNAL1: P9.4 PH1.3 R3.2 | length 14.9
  Top Layer w0.254: PH1.3 85.344,-106.106 R3.2 89.728,-110.49 P9.4
SIGNAL2: P9.3 PH3.3 R7.2 | length 14.4
  Top Layer w0.254: PH3.3 91.821,-106.111 R7.2 94.808,-109.22 P9.3
SIGNAL3: P9.2 PH5.3 R11.2 | length 13.5
  Top Layer w0.254: PH5.3 98.933,-106.111 R11.2 99.888,-107.188 P9.2
SIGNAL4: P9.1 PH7.3 R14.2 | length 13.1
  Top Layer w0.254: P9.1 R14.2 105.029,-106.111 PH7.3
W1: J_XS1.41 PH9.1 | length 42.9
  Top Layer w0.254: PH9.1 40.513,-98.044 52.578,-85.979 52.578,-62.738 52.105,-62.265 J_XS1.41
W2: J_XS1.42 PH8.1 | length 40.5
  Top Layer w0.254: PH8.1 50.419,-96.52 53.467,-93.472 53.467,-62.484 52.598,-61.615 J_XS1.42
W3: J_XS1.43 PH10.1 | length 42.9
  Top Layer w0.254: J_XS1.43 52.71,-60.965 53.975,-62.23 53.975,-78.596 60.706,-85.327 PH10.1
W4: J_XS1.44 PH1.1 | length 55.4
  Top Layer w0.254: J_XS1.44 56.76,-60.316 88.265,-91.821 88.265,-92.71 86.614,-94.361 PH1.1
W5: J_XS1.45 PH3.1 | length 61.1
  Top Layer w0.254: J_XS1.45 50.535,-59.782 57.623,-59.782 86.868,-89.027 92.583,-89.027 93.091,-89.535 PH3.1
W6: J_XS1.46 PH5.1 | length 68.4
  Top Layer w0.254: J_XS1.46 57.746,-59.016 87.249,-88.519 98.933,-88.519 100.203,-89.789 PH5.1
W7: J_XS1.47 PH7.1 | length 75.2
  Top Layer w0.254: J_XS1.47 58.113,-58.367 87.757,-88.011 105.41,-88.011 106.299,-88.9 PH7.1
XTAL: 1.2 C_8.2 J_XS1.35 R_XT1.2 | length 25.1
  Top Layer w0.254: J_XS1.35 44.656,-72.342 47.625,-75.311 1.2 49.473,-76.511 46.736,-79.248 R_XT1.2 46.609,-81.534 C_8.2
pads on no net: J_ref1.1 J_ref1.3 J_ref1.5 J_ref1.7 J_ref1.8 J_XS1.5 J_XS1.6 J_XS1.7 J_XS1.8 J_XS1.11 J_XS1.12 J_XS1.13 J_XS1.14 J_XS1.19 J_XS1.20 J_XS1.21 J_XS1.22 J_XS1.23 J_XS1.24 J_XS1.25 J_XS1.26 J_XS1.27 J_XS1.37 J_XS1.38 J_XS1.39 J_XS1.40 J_XS1.48 J_XS1.54 J_XS1.55 J_XS1.56 J_XS1.57 J_XS1.58 J_XS1.63 J_XS1.64 J_XS1.65 J_XS1.66 J_XS1.68 J_XS1.69 J_XS1.70 J_XS1.71 J_XS1.72 J_XS1.73 J_XS1.78 P5.3 P5.5 U2.5 U2.6 U2.7
copper on no net: | length 0.2
  Top Layer w0.254: 44.069,-118.999 44.196,-118.872
  other v1: 50.165,-82.423 38.1,-82.169 38.354,-80.518 47.625,-80.137 48.895,-78.74 37.084,-77.724 50.292,-77.089 36.83,-73.914 50.165,-73.914 42.672,-72.263 46.355,-72.263 75.819,-71.247 78.994,-71.247 94.234,-71.247 90.17,-71.12 42.672,-69.977 46.355,-69.977 75.946,-60.325 79.375,-60.198 90.043,-60.198 95.631,-59.055
  other v2: 3.5,-116.5 146.5,-116.5 3.5,-3.5 146.5,-3.5

## Polygon pours and split planes (outlines as drawn)
no net on GND (split plane): 99.066,-22.779 83.739,-38.106 0.51,-38.106 0.51,-0.51 99.066,-0.51
no net on GND (split plane): 122.434,-56.977 122.434,-83.318 85.973,-83.318 85.973,-61.168 96.728,-50.413 115.87,-50.413
no net on GND (split plane): 149.49,-119.49 0.51,-119.49 0.51,-39.11 83.947,-39.11 84.045,-39.101 84.139,-39.072 84.226,-39.026 84.302,-38.963 99.923,-23.342 99.986,-23.266 100.032,-23.179 100.061,-23.085 100.07,-22.987 100.07,-0.51 149.49,-0.51
no net on VCC (split plane): 122.434,-56.977 122.434,-83.439 122.434,-83.445 85.973,-83.445 85.973,-61.041 96.474,-50.54 115.997,-50.54
no net on VCC (split plane): 149.49,-119.49 4.665,-119.49 39.705,-84.449 149.49,-84.449
no net on VCC (split plane): 99.066,-22.779 83.612,-38.233 0.51,-38.233 0.51,-0.51 99.066,-0.51
no net on VCC (split plane): 149.49,-83.445 123.652,-83.445 123.438,-83.231 123.438,-56.769 123.429,-56.671 123.4,-56.577 123.354,-56.49 123.291,-56.414 116.56,-49.683 116.484,-49.62 116.397,-49.574 116.303,-49.545 116.205,-49.536 96.266,-49.536 96.168,-49.545 96.074,-49.574 95.987,-49.62 95.911,-49.683 85.116,-60.478 85.053,-60.554 85.007,-60.641 84.978,-60.735 84.969,-60.833 84.969,-83.445 39.497,-83.445 39.399,-83.454 39.305,-83.483 39.218,-83.529 39.142,-83.592 3.455,-119.279 3.392,-119.355 3.346,-119.442 3.331,-119.49 0.51,-119.49 0.51,-39.237 83.82,-39.237 83.918,-39.228 84.012,-39.199 84.099,-39.153 84.175,-39.09 99.923,-23.342 99.986,-23.266 100.032,-23.179 100.061,-23.085 100.07,-22.987 100.07,-0.51 149.49,-0.51

## Keep-outs
Keep-Out Layer:
  the board outline again, w0.254

## Other copper
GND (plane layer: these items are gaps in the copper):
  lines w1: 0.508,-38.608 83.947,-38.608 99.568,-22.987 99.568,0 ; 85.471,-83.82 85.471,-60.96 96.52,-49.911 116.078,-49.911 122.936,-56.769 122.936,-83.82 85.471,-83.82
VCC (plane layer: these items are gaps in the copper):
  lines w1: 0,-38.735 83.82,-38.735 99.568,-22.987 99.568,-0.127 ; 3.81,-119.634 39.497,-83.947 150,-83.947 ; 85.471,-83.947 85.471,-60.833 96.266,-50.038 116.205,-50.038 122.936,-56.769 122.936,-83.439 123.444,-83.947 125.603,-83.947

## Silkscreen, mask and mechanical layers (free items; w line width, h text height)
Top Overlay:
  text "ANGEL1" at 9.525,-29.845 h1.52
  text "CON12V" at 9.906,-40.894 h1.52
  text "BUTTON3" at 1.27,-73.279 h1.52
  text "BUTTON2" at 1.27,-77.851 h1.52
  text "BUTTON1" at 1.524,-83.312 h1.52
  text "CANL" at 112.649,-109.982 h1.52
  text "CANH" at 119.38,-109.982 h1.52
  text "1" at 105.664,-113.538 h1.52 r270
  text "BUZZER2" at 62.23,-115.062 h1.52
  text "12V" at 139.192,-116.332 h1.52

## Text inside footprints (layer, text, board x,y; h text height)
1: Top Overlay "Y1" at 40.456,-74.435 h0.64
DM2: Top Overlay "VO+" at 148.082,-85.344 h1.5 r180; Top Overlay "VO-" at 127.635,-85.471 h1.5 r180; Top Overlay "VI+" at 142.494,-103.251 h1.5 r180; Top Overlay "VI-" at 132.588,-103.378 h1.5 r180
J_XS1: Top Overlay "MC9S12XE" at 39.014,-56.245 h1.2
P5: Top Overlay "6" at 10.795,-60.325 h1.2 r180; Top Overlay "5" at 10.795,-57.785 h1.2 r180; Top Overlay "2" at 19.939,-60.325 h1.2 r180; Top Overlay "1" at 19.431,-57.785 h1.2 r180
TANT1: Top Overlay "TANT" at 77.47,-40.64 h1.2 r180
U4: Mechanical 13 "*" at 82.575,-61.976 h1.2
U5: Top Overlay "DEV" at 133.985,-61.214 h1.2; Top Overlay "PN" at 133.985,-61.214 h1.2; Top Overlay "VAL" at 133.985,-61.214 h1.2; Top Overlay "TOL" at 133.985,-61.214 h1.2; Top Overlay "u" at 125.349,-55.042 h1.2